# Allegro board 05hallas5600tr_v1_00_00.brd
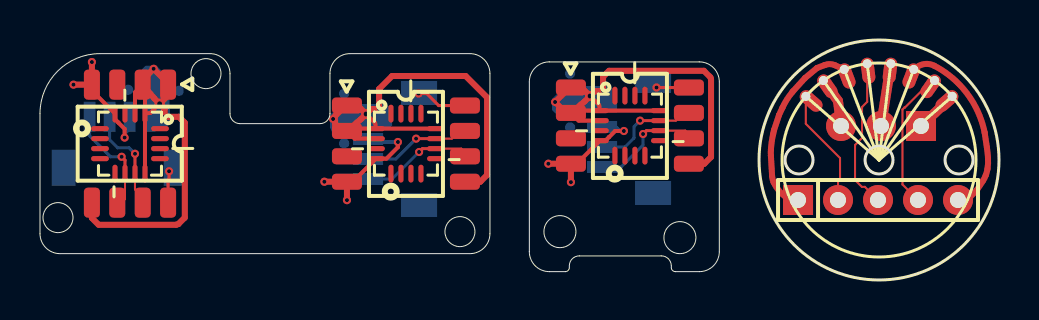
[diagram p0: board, top side]
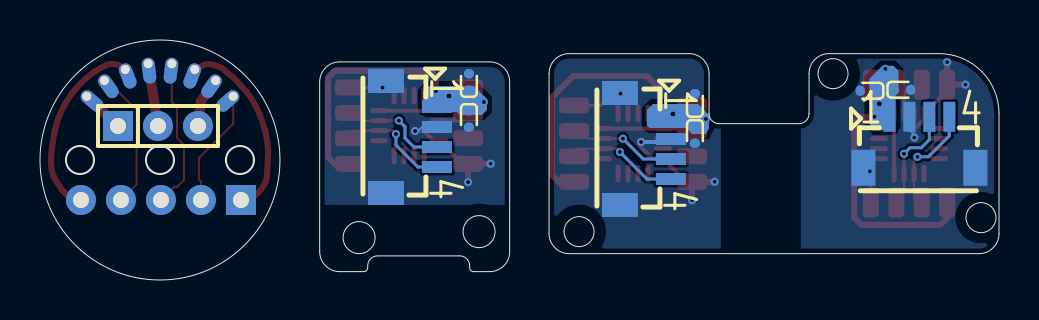
[diagram p1: board, bottom side, seen from below]

Outline 47.96 x 12 mm; copper layers: TOP, BOTTOM. Coordinates in mm from the lower left corner of the outline.
Outline path: circle c0.9,3.12 r0.75 ; circle c8.3,10.32 r0.75 ; circle c21,2.42 r0.75 ; circle c26,2.42 r0.8 ; circle c32,2.12 r0.8 ; circle c41.96,6 r6 ; 0,8.32 arc(0.88,10.44) 3,11.32 8.5,11.32 arc(9.21,11.03) 9.5,10.32 9.5,8.32 arc(9.65,7.96) 10,7.82 14,7.82 arc(14.35,7.96) 14.5,8.32 14.5,10.32 arc(14.79,11.03) 15.5,11.32 21.5,11.32 arc(22.21,11.03) 22.5,10.32 22.5,2.32 arc(22.21,1.61) 21.5,1.32 1,1.32 arc(0.29,1.61) 0,2.32 0,8.32 ; 24.47,9.91 24.47,1.42 arc(24.76,0.71) 25.47,0.42 26.27,0.42 arc(26.41,0.48) 26.47,0.62 26.47,0.71 arc(26.62,1.06) 26.97,1.21 31.07,1.21 arc(31.42,1.06) 31.57,0.71 31.57,0.62 arc(31.63,0.48) 31.77,0.42 32.97,0.42 arc(33.68,0.71) 33.97,1.42 33.97,9.91 arc(33.68,10.61) 32.97,10.91 25.47,10.91 arc(24.76,10.61) 24.47,9.91

## Design rules (mm)
constraint set DEFAULT: min track width 0.102

## Placement (name value [footprint] x y rotation side)
C16  100nF/0402/25V/10%  [C0402]  4.83 9.51 180 bottom
C24  100nF/0402/25V/10%  [C0402]  26.51 9.9 90 bottom
C53  100nF/0402/25V/10%  [C0402]  15.21 7.25 270 bottom
C54  100nF/0402/25V/10%  [C0402]  26.51 8.05 270 bottom
C55  100nF/0402/25V/10%  [C0402]  15.21 8.9 90 bottom
C56  100nF/0402/25V/10%  [C0402]  6.53 9.46 0 bottom
J1  PIN-005  [PIN05_2D0MM_1X5]  37.91 4 0 top
J2  PIN-003  [PIN03_2D0MM_1X3]  44.06 7.7 180 bottom
J3  A1002WV-S-4P  [SH-04P-1D0-H]  30.66 7.15 270 bottom
J4  A1002WV-S-4P  [SH-04P-1D0-H]  18.96 6.55 270 bottom
J5  A1002WV-S-4P  [SH-04P-1D0-H]  3.98 5.61 180 bottom
J7  1218RD-8P  [BLDC1218RD-8P]  41.96 6 0 top
U11  NC_MT6701QT-STD  [QFN16-0303LH]  4.5 6.82 270 top
U14  NC_MT6701QT-STD  [QFN16-0303LH]  18.3 6.82 0 top
U26  AS5600-ASOT  [SOP-8]  29.5 7.72 0 top
U28  NC_MT6701QT-STD  [QFN16-0303LH]  29.5 7.72 0 top
U29  AS5600-ASOT  [SOP-8]  18.3 6.82 0 top
U30  AS5600-ASOT  [SOP-8]  4.5 6.82 270 top

## Library data of the parts
C16 C24 C53-C56 = CAP
J1 = PIN-005
J2 = PIN-003
J3-J5 = GH-04P-1d25-W
J7 = 1218RD-8P
U11 U14 U28 = MT6701qfn
U26 U29 U30 = AS5600

## Footprints (pads in the part's own frame, mm; a bottom-side part is the same pattern mirrored in y, then rotated)
BLDC1218RD-8P
  oval 0.65x1.3 hole 0.45 unplated rot 49: (-3.66,3.182)
  oval 0.65x1.3 hole 0.45 unplated rot 35: (-2.782,3.973)
  oval 0.65x1.3 hole 0.45 unplated rot 21: (-1.738,4.528)
  oval 0.65x1.3 hole 0.45 unplated rot 7: (-0.591,4.814)
  oval 0.65x1.3 hole 0.45 unplated rot 173: (0.591,4.814)
  oval 0.65x1.3 hole 0.45 unplated rot 159: (1.738,4.528)
  oval 0.65x1.3 hole 0.45 unplated rot 145: (2.782,3.973)
  oval 0.65x1.3 hole 0.45 unplated rot 131: (3.66,3.182)
C0402
  custom 0.475x0.51 smd: 1(-0.406,0) 2(0.406,0)
PIN03_2D0MM_1X3
  round 1.5 hole 0.8 unplated: (2,0) (4,0)
  rect 1.5x1.5 hole 0.8: 1(0,0)
PIN05_2D0MM_1X5
  round 1.5 hole 0.8 unplated: (2,0) (4,0) (6,0) (8,0)
  rect 1.5x1.5 hole 0.8: 1(0,0)
QFN16-0303LH
  oval 0.254x0.889 smd: 1(-0.75,-1.5) 2(-0.25,-1.5) 3(0.25,-1.5) 4(0.75,-1.5) 9(0.75,1.5) 10(0.25,1.5) 11(-0.25,1.5) 12(-0.75,1.5)
  oval 0.889x0.254 smd: 5(1.5,-0.75) 6(1.5,-0.25) 7(1.5,0.25) 8(1.5,0.75) 13(-1.5,0.75) 14(-1.5,0.25) 15(-1.5,-0.25) 16(-1.5,-0.75)
SH-04P-1D0-H
  rect 0.6x1.5 smd: 1(-1.5,2.55) 2(-0.5,2.55) 3(0.5,2.55) 4(1.5,2.55)
  rect 1.2x1.8 smd: G1(2.8,0) G2(-2.8,0)
SOP-8
  rrect 1.5x0.8 smd: 1(-2.95,1.905) 2(-2.95,0.635) 3(-2.95,-0.635) 4(-2.95,-1.905) 5(2.95,-1.905) 6(2.95,-0.635) 7(2.95,0.635) 8(2.95,1.905)

## Nets
GND_1: C24.2 C54.2 J3.2 J3.G1 J3.G2 U26.4 U26.8 U28.16
GND_2: C53.2 C55.2 J4.2 J4.G1 J4.G2 U14.16 U29.4 U29.8
GND_3: C16.2 C56.2 J5.2 J5.G1 J5.G2 U11.16 U30.4 U30.8
GND_POWER: J1.1
VCC3V3MCU_1: C24.1 C54.1 J3.1 U26.1(VDD5V) U26.2 U26.5 U28.8 U28.13(VDD) U28.14
VCC3V3MCU_2: C53.1 C55.1 J4.1 U14.8 U14.13(VDD) U14.14 U29.1(VDD5V) U29.2 U29.5
VCC3V3MCU_3: C16.1 C56.1 J5.1 U11.8 U11.13(VDD) U11.14 U30.1(VDD5V) U30.2 U30.5
MA_3: J2.1
SCL_1: J3.3 U26.7 U28.7
SCL_2: J4.3 U14.7 U29.7
SCL_3: J5.3 U11.7 U30.7
SDA_1: J3.4 U26.6 U28.6
SDA_2: J4.4 U14.6 U29.6
SDA_3: J5.4 U11.6 U30.6

Pads without a net: U11 1 2 3 4 5 9 10 11 12 15; U14 1 2 3 4 5 9 10 11 12 15; U26 3; U28 1 2 3 4 5 9 10 11 12 15; U29 3; U30 3

## Via types
v1: diameter 0.406, hole 0.203, TOP to BOTTOM, 24 vias
v2: diameter 0.508, hole 0.254, TOP to BOTTOM, 3 vias

## Routing (per net, layer and track width the routed paths; a pad name or vN(x,y) marks a point on that pad's centre or on a via; arc(x,y) is an arc through that point)
GND_1: length 8.2
  TOP w0.152: U26.8 v1(30.83,9.62)
  TOP w0.2: U26.4 26.84,5.81 U28.16 28.27,6.97 28.45,7.14 28.45,7.14 28.76,7.45 v1(29.2,7.45)
  TOP w0.3: v1(26.55,4.89) U26.4 v1(25.42,5.81)
  BOTTOM w0.102: v1(29.2,7.45) 29.06,7.45 28.86,7.65 J3.2
GND_2: length 9.7
  TOP w0.152: U29.8 19.94,8.72 19.34,9.32 v1(18.93,9.32)
  TOP w0.2: v1(17.9,6.9) 17.9,6.64 17.32,6.07 U14.16 15.65,4.91 U29.4
  TOP w0.3: v1(14.22,4.91) U29.4 v1(15.35,3.99)
  BOTTOM w0.2: J4.2 16.56,6.9 v1(17.9,6.9)
GND_3: length 8.1
  TOP w0.152: U30.8 6.41,4.98 6.45,5.03 v1(6.45,5.44)
  TOP w0.2: U30.4 2.59,9.47 U11.16 3.75,8.04 3.92,7.87 3.92,7.86 4.23,7.55 v1(4.23,7.12)
  TOP w0.3: v1(1.68,9.77) U30.4 v1(2.59,10.9)
  BOTTOM w0.102: v1(4.23,7.12) 4.23,7.26 4.43,7.46 4.43,8.11 J5.2
GND_POWER: length 9.6
  TOP w0.3: J1.1 37.54,4 37.5,4.02 arc(37.02,4.39) 36.68,4.9 arc(36.63,5.04) 36.61,5.19 36.55,6.22 arc(36.55,6.37) 36.55,6.52 arc(36.59,6.91) 36.66,7.3 36.71,7.5 36.96,8.25 37.13,8.61 arc(37.34,9.01) 37.61,9.38 37.67,9.45 38.26,10.1 38.86,10.6 39.25,10.75 arc(39.51,10.8) 39.75,10.74 40.22,10.53
VCC3V3MCU_1: length 24.7
  TOP w0.2: U28.8 U28.13 ; U28.13 26.67,8.47 U26.2 26.94,7.97 U28.14 ; U28.13 27.96,8.75 v2(27.51,9.2)
  TOP w0.3: v2(27.51,9.2) 27.17,9.54 U26.1 26.48,9.62 v1(25.76,8.9) 26.3,8.35 U26.2 27.23,8.93 v2(27.51,9.2) ; v2(27.51,9.2) 27.76,9.45 v1(28.16,9.45) 28.16,10.16 28.46,10.46 33.2,10.46 33.52,10.14 33.56,10.03 33.56,6.15 33.22,5.81 U26.5
  BOTTOM w0.3: v2(27.51,9.2) 27.86,9.55 28.06,9.55 v1(28.16,9.45)
VCC3V3MCU_2: length 25.3
  TOP w0.2: U14.13 15.47,7.57 U29.2 15.74,7.07 U14.14 ; U14.13 U14.8 ; U14.13 16.76,7.85 v2(16.31,8.3)
  TOP w0.3: U29.5 22.02,4.91 22.36,5.25 22.36,9.13 21.28,10.2 17.61,10.2 16.96,9.55 v1(16.96,8.55) 16.56,8.55 v2(16.31,8.3) ; v2(16.31,8.3) 16.03,8.03 U29.2 15.1,7.45 14.76,7.8 14.76,7.95 v1(14.66,8.05) 14.76,8.15 14.76,8.2 15.28,8.72 U29.1 15.97,8.64 v2(16.31,8.3)
  BOTTOM w0.3: v2(16.31,8.3) 16.66,8.65 16.86,8.65 v1(16.96,8.55)
VCC3V3MCU_3: length 24.7
  TOP w0.2: U11.8 U11.13 ; U11.13 5.53,8.36 v2(5.98,8.81) ; U11.13 5.25,9.65 U30.2 4.75,9.38 U11.14
  TOP w0.3: U30.5 2.59,3.1 2.93,2.76 6.81,2.76 6.92,2.79 7.24,3.12 7.24,7.86 6.94,8.16 v1(6.23,8.16) 6.23,8.56 v2(5.98,8.81) ; v2(5.98,8.81) 6.32,9.15 U30.1 6.41,9.84 v1(5.68,10.56) 5.14,10.01 U30.2 5.71,9.08 v2(5.98,8.81)
  BOTTOM w0.3: v1(6.23,8.16) 6.33,8.26 6.33,8.46 v2(5.98,8.81)
VCC_3: length 9.6
  TOP w0.3: 43.69,10.53 43.84,10.64 arc(44.27,10.8) 44.72,10.71 arc(46.36,9.32) 47.24,7.36 47.35,6.63 arc(47.39,6.35) 47.41,6.08 arc(47.41,5.82) 47.38,5.56 arc(47.35,5.39) 47.29,5.23 arc(47.23,5.09) 47.16,4.96 46.86,4.51 arc(46.84,4.49) 46.82,4.46 46.47,4.11 arc(46.34,4.03) 46.2,4 45.91,4
HA_3: length 5.9
  TOP w0.102: 39.91,4 39.91,4.93 40.01,5.03 40.01,6.1 38.3,7.81 38.3,9.18
HB_3: length 7.6
  TOP w0.102: 41.91,4 41.25,4.66 41.1,4.66 40.76,5 40.76,6.75 41.11,7.1 41.11,8.65 41.37,8.91 41.37,10.81
HC_3: length 7.1
  TOP w0.102: 43.91,4 43.13,4.78 43.13,8.52 43.23,8.63 43.26,8.63 44.6,9.97 44.74,9.97
MA_3: length 2.2
  TOP w0.5: 45.62,9.18 J2.1
MB_3: length 3.2
  TOP w0.5: 42.55,10.81 42.06,7.7
MC_3: length 2.5
  TOP w0.5: 39.17,9.97 39.91,8.95 40.06,7.7
SCL_1: length 5.4
  TOP w0.102: 32.4,8.35 32.18,8.35 31.8,7.97 U28.7
  TOP w0.152: U28.7 v1(30.01,7.97)
  TOP w0.2: 32.4,8.35 U26.7
  BOTTOM w0.152: v1(30.01,7.97) 29.71,7.67 29.71,7.1 29.26,6.65 J3.3
SCL_2: length 5.4
  TOP w0.102: U14.7 20.6,7.07 20.98,7.45 21.2,7.45
  TOP w0.152: U14.7 v1(18.81,7.07)
  TOP w0.2: 21.2,7.45 U29.7
  BOTTOM w0.152: v1(18.81,7.07) 17.79,6.05 J4.3
SCL_3: length 5.3
  TOP w0.102: 5.14,3.92 5.14,4.14 4.75,4.52 U11.7
  TOP w0.152: U11.7 v1(4.75,6.31)
  TOP w0.2: 5.14,3.92 U30.7
  BOTTOM w0.152: J5.3 3.48,7.01 3.88,6.61 4.45,6.61 v1(4.75,6.31)
SDA_1: length 5.7
  TOP w0.102: U28.6 32.27,7.47 32.45,7.29 U26.6
  TOP w0.152: v1(30.16,7.3) 30.33,7.47 U28.6
  BOTTOM w0.152: J3.4 29.06,5.65 30.16,6.75 v1(30.16,7.3)
SDA_2: length 5.8
  TOP w0.102: U29.6 21.25,6.39 21.07,6.57 U14.6
  TOP w0.152: U14.6 19.13,6.57 v1(18.96,6.4)
  BOTTOM w0.152: J4.4 17.61,5.05 v1(18.96,6.4)
SDA_3: length 5.6
  TOP w0.102: U30.6 4.07,3.87 4.25,4.05 U11.6
  TOP w0.152: U11.6 4.25,5.99 v1(4.08,6.16)
  BOTTOM w0.152: J5.4 2.48,7.21 3.53,6.16 v1(4.08,6.16)

## Copper pours and planes (outline as drawn; the poured copper is in the pictures)
VCC3V3MCU_1 on BOTTOM (solid shape): 28.81,9.4 28.81,8.6 28.61,8.4 27.11,8.4 26.96,8.25 25.86,8.25 25.61,8.5 25.61,9.05 26.26,9.7 28.51,9.7
VCC3V3MCU_2 on BOTTOM (solid shape): 17.61,8.5 17.61,7.7 17.46,7.6 15.61,7.6 15.36,7.3 14.66,7.3 14.51,7.6 14.51,8.25 15.06,8.8 17.31,8.8
VCC3V3MCU_3 on BOTTOM (solid shape): 6.48,10.06 6.48,7.81 6.18,7.51 5.38,7.51 5.18,7.71 5.18,9.21 5.03,9.36 5.03,10.46 5.28,10.71 5.83,10.71
GND_1 on BOTTOM: 24.72,9.91 24.94,10.44 25.47,10.66 32.97,10.66 33.5,10.44 33.72,9.91 33.72,3.75 24.72,3.75
GND_2 on BOTTOM: 14.75,10.32 14.97,10.85 15.5,11.07 21.5,11.07 22.03,10.85 22.25,10.32 22.25,2.32 22.03,1.79 21.5,1.57 13.91,1.57 13.91,7.57 14,7.57 14.53,7.79 14.75,8.32 ; 1 cut-out
GND_3 on BOTTOM: 0.25,8.32 1.06,10.26 3,11.07 8.5,11.07 9.03,10.85 9.25,10.32 9.25,8.32 9.44,7.82 9.91,7.57 9.91,1.57 1,1.57 0.47,1.79 0.25,2.32

## Text on the board
User.Comments: CR_HALL_2
User.24: FIGURE | FINISHED_SIZE | 0.2032 | 0.254 | 0.8 | 0.45 | DRILL CHART: TOP to BOTTOM | ALL UNITS ARE IN MILLIMETERS | PLATED | NON-PLATED | QTY | 24 | 3 | 2 | 8 | 6
